# Altium PCB PCB1.pcbdoc
Units mm, origin at the board's own origin, x right, y up, seen from the top; angles counter-clockwise.
Board outline 132.72 x 69.07 mm, 2 copper layers (Top Layer, Bottom Layer); 46 components, 23 nets, 129 pads, 205 vias.
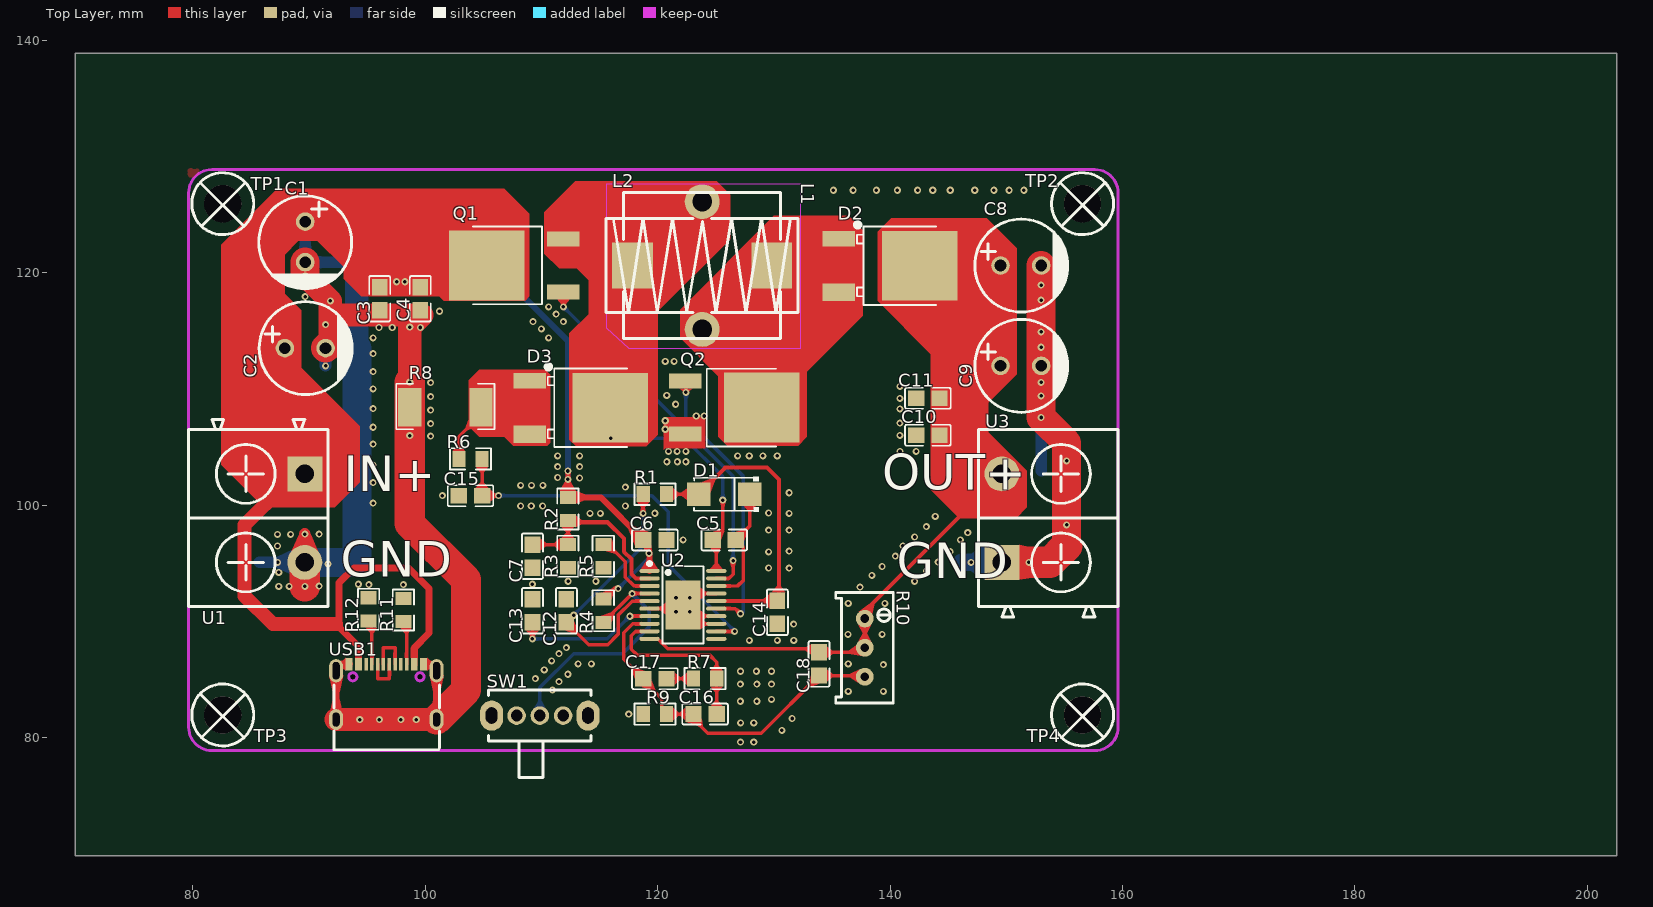
[diagram p0: Top Layer view]
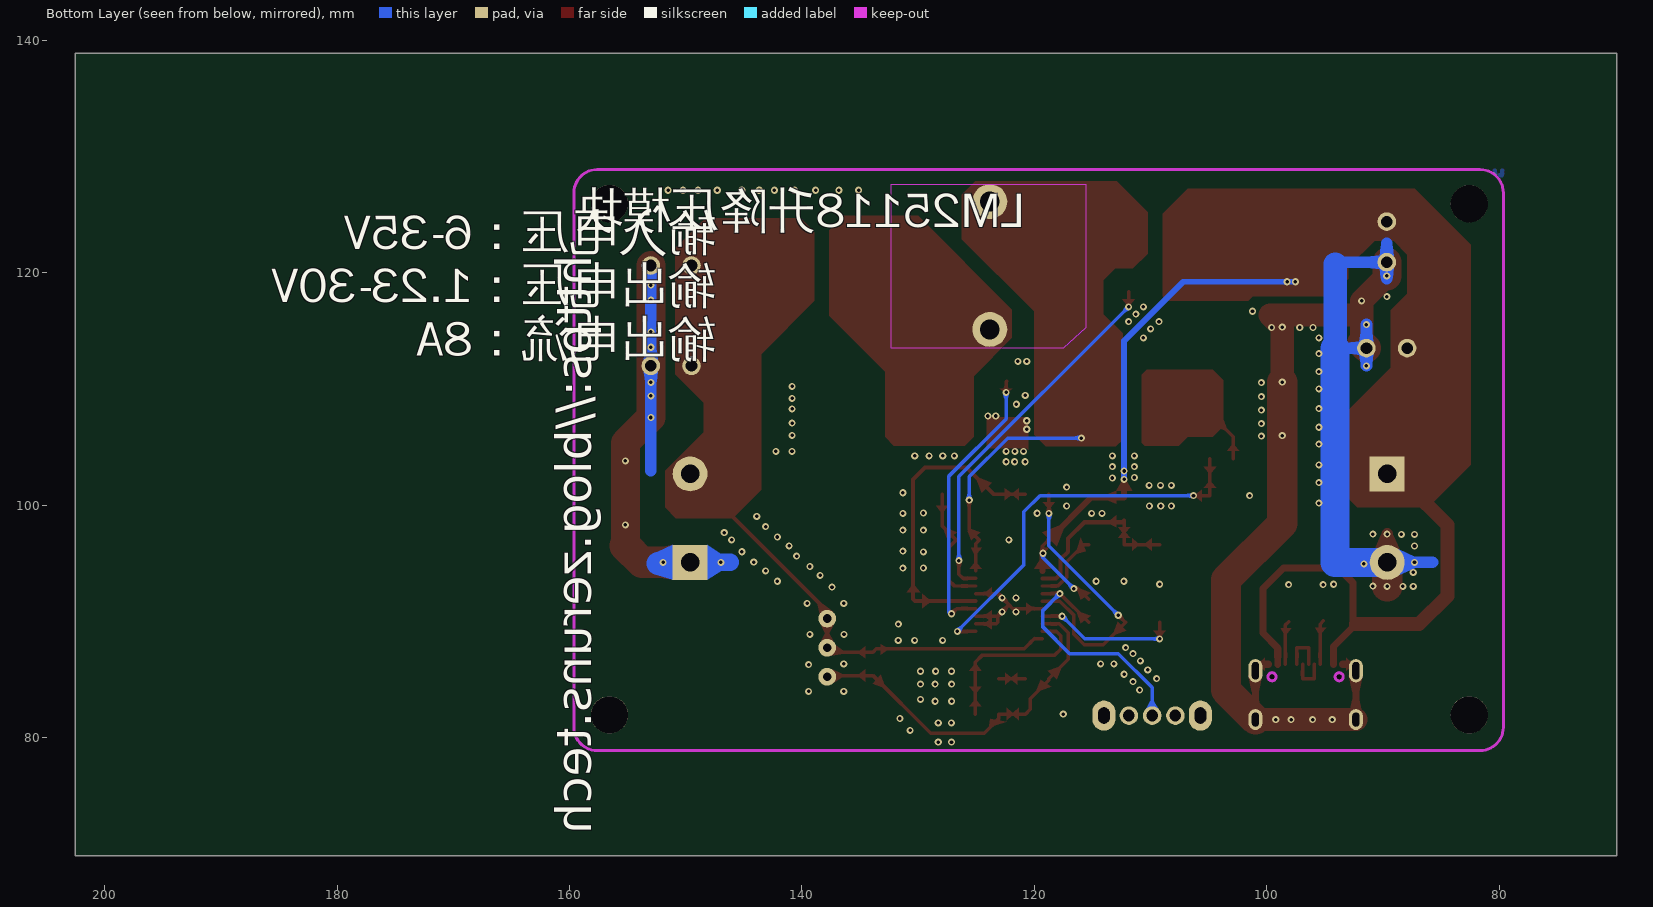
[diagram p1: Bottom Layer view, seen from below]

## Layer stack, top to bottom
Top Layer: signal copper (thickness not stored)
Dielectric: dielectric 0.32, FR-4, Dk 4.8
Bottom Layer: signal copper (thickness not stored)

## Board outline
202.565,69.85 69.85,69.85 69.85,138.919 202.565,138.919

## Design rules (kind name [scope] priority, off if disabled: settings)
BoardOutlineClearance copperThickness1oz [All] p0: genericclearance=0.254 ignorepadtopadclearanceinfootprint=FALSE except(0: Arc-SplitContinuation Track-SplitContinuation SMDPad-SplitContinuation THPad-SplitContinuation Via-SplitContinuation Fill-SplitContinuation Poly-SplitContinuation Region-SplitContinuation Text-SplitContinuation; 0.152: Track-CutoutEdge SMDPad-CutoutEdge THPad-CutoutEdge Via-CutoutEdge Fill-CutoutEdge Region-CutoutEdge; 0.3: Track-OutlineEdge SMDPad-OutlineEdge THPad-OutlineEdge Via-OutlineEdge Fill-OutlineEdge Region-OutlineEdge Poly-OutlineEdge Text-OutlineEdge)
BoardOutlineClearance copperThickness2oz [All] p0: genericclearance=0.254 ignorepadtopadclearanceinfootprint=FALSE except(0: Arc-SplitContinuation Track-SplitContinuation SMDPad-SplitContinuation THPad-SplitContinuation Via-SplitContinuation Fill-SplitContinuation Poly-SplitContinuation Region-SplitContinuation Text-SplitContinuation; 0.152: Track-CutoutEdge SMDPad-CutoutEdge THPad-CutoutEdge Via-CutoutEdge Fill-CutoutEdge Region-CutoutEdge; 0.3: Track-OutlineEdge SMDPad-OutlineEdge THPad-OutlineEdge Via-OutlineEdge Fill-OutlineEdge Region-OutlineEdge Poly-OutlineEdge Text-OutlineEdge)
Clearance copperThickness1oz [(InNet('GND') OR InNet('EN') OR InNet('VIN') OR InNet('RT') OR InNet('RAMP') OR InNet('SS') OR InNet('$1N2811') OR InNet('$1N2592') OR InNet('VOUT') OR InNet('$1N2863') OR InNet('$1N2110') OR InNet('$1N2161') OR InNet('$1N2871') OR InNet('$1N3011') OR InNet('$1N2947') OR InNet('$1N2545') OR InNet('$1N3296') OR InNet('USB_D-') OR InNet('USB_D+') OR InNet('$1N3257') OR InNet('$1N3385') OR InNet('$1N3398') OR InNet('$1N4331'))] p1: gap=0.178 ignorepadtopadclearanceinfootprint=FALSE except(0.102: Track-Track; 0.152: Track-SMDPad SMDPad-SMDPad Track-THPad SMDPad-THPad THPad-THPad Track-Via SMDPad-Via THPad-Via Via-Via Track-Fill SMDPad-Fill THPad-Fill Via-Fill Fill-Fill Track-Region SMDPad-Region THPad-Region Via-Region Fill-Region Region-Region Track-Poly SMDPad-Poly THPad-Poly Via-Poly Fill-Poly Region-Poly Poly-Poly Track-Text SMDPad-Text THPad-Text Via-Text Fill-Text Region-Text Poly-Text Text-Text Track-Hole SMDPad-Hole THPad-Hole Via-Hole Fill-Hole Region-Hole Poly-Hole Text-Hole; 0.3: Track-Sheet SMDPad-Sheet THPad-Sheet Via-Sheet Fill-Sheet Region-Sheet Poly-Sheet Text-Sheet Sheet-Hole)
Clearance copperThickness2oz [All] p1: gap=0.178 ignorepadtopadclearanceinfootprint=FALSE except(0.152: Track-SMDPad SMDPad-SMDPad Track-THPad SMDPad-THPad THPad-THPad Track-Via SMDPad-Via THPad-Via Via-Via Track-Fill SMDPad-Fill THPad-Fill Via-Fill Fill-Fill Track-Region SMDPad-Region THPad-Region Via-Region Fill-Region Region-Region Track-Poly SMDPad-Poly THPad-Poly Via-Poly Fill-Poly Region-Poly Poly-Poly Track-Text SMDPad-Text THPad-Text Via-Text Fill-Text Region-Text Poly-Text Text-Text Track-Hole SMDPad-Hole THPad-Hole Via-Hole Fill-Hole Region-Hole Poly-Hole Text-Hole; 0.203: Track-Track; 0.3: Track-Sheet SMDPad-Sheet THPad-Sheet Via-Sheet Fill-Sheet Region-Sheet Poly-Sheet Text-Sheet Sheet-Hole)
DiffPairsRouting differentialPair [All] p1: maxuncoupledlength=10 minlimit=5.9843 maxlimit=5.9843 mostfreqgap=5.9843 toplayer_minwidth=5 toplayer_prefwidth=10 toplayer_maxwidth=100 bottomlayer_minwidth=5 bottomlayer_prefwidth=10 bottomlayer_maxwidth=100
PasteMaskExpansion pasteMaskExpansion [All] p1: expansion=0
PlaneConnect innerPlane [All] p1: planeconnectstyle=Relief reliefexpansion=0.508 reliefentries=4 reliefconductorwidth=0.254 reliefairgap=0.254
PolygonConnect copperRegion [All] p1: connectstyle=Relief reliefentries=4 reliefconductorwidth=19.685 polygonreliefangle="90 Angle" airgapwidth=10
RoutingVias viaSize [All] p1: viastyle="Through Hole" holewidth=12.0078 minholewidth=11.811 maxholewidth=248.0314 width=24.0158 minwidth=19.685 maxwidth=393.7008
SolderMaskExpansion solderMaskExpansion [All] p1: useseparateexpansions=TRUE expansion=2.0079 expansionbottom=2.0079
Width copperThickness1oz [All] p1: maxlimit=118 minlimit=5 preferedwidth=10
Width copperThickness2oz [All] p1: maxlimit=100 minlimit=8 preferedwidth=10

## Components (designator, comment, footprint, x,y, rotation, side; value= is the part's Value field where it differs from the comment)
C1 "GR227M035F12RR0VL4FP0" CAP-TH_BD8.0-P3.50-D0.6-FD 89.662,122.663 r270 top
C2 "KNH2220UF35V149EC0049" CAP-TH_BD8.0-P3.50-D0.6-FD-2 89.662,113.519 r0 top
C3 "CAP_0805" C0805 96.072,117.775 r90 top
C4 "CAP_0805" C0805 99.572,117.775 r90 top
C5 "CAP_0805" C0805 125.73,97.009 r180 top
C6 "CAP_0805" C0805 119.761,97.009 r0 top
C7 "CAP_0805" C0805 109.22,95.612 r90 top
C8 "GR227M035F12RR0VL4FP0" CAP-TH_BD8.0-P3.50-D0.6-FD 151.257,120.631 r0 top
C9 "KNH2220UF35V149EC0049" CAP-TH_BD8.0-P3.50-D0.6-FD-2 151.257,111.995 r0 top
C10 "CAP_0805" C0805 143.256,106.026 r0 top
C11 "CAP_0805" C0805 143.256,109.201 r0 top
C12 "CAP_0805" C0805 112.141,90.913 r270 top
C13 "CAP_0805" C0805 109.22,90.913 r270 top
C14 "CAP_0805" C0805 130.302,90.786 r90 top
C15 "CAP_0805" C0805 103.886,100.819 r0 top
C16 "CAP_0805" C0805 124.079,82.023 r0 top
C17 "CAP_0805" C0805 119.761,85.071 r0 top
C18 "CAP_0805" C0805 133.888,86.339 r90 top
D1 "SS310_C15874" SMA_L4.3-W2.6-LS5.2-RD 125.73,100.946 r180 top
D2 "SBDD2045CT" TO-252-2_L6.5-W6.1-P4.58-LS10.0-TL 139.065,120.631 r0 top
D3 "SBDD2045CT" TO-252-2_L6.5-W6.1-P4.58-LS10.0-TL 112.445,108.41 r0 top
L1 "SLT050125T100MUB" IND-TH_L16.5-W8.5-P11.00-D1.0 123.825,120.631 r270 top
L2 "XR1265-100M" IND-SMD_L13.5-W12.6 123.825,120.631 r0 top
Q1 "NCE7560K" TO-252-2_L6.6-W6.1-P4.57-LS9.9-TL-CW 108.585,120.631 r180 top
Q2 "NCE7560K" TO-252-2_L6.6-W6.1-P4.57-LS9.9-TL-CW 125.684,108.41 r0 top
R1 "Res_0805" R0805 119.761,100.946 r0 top
R2 "Res_0805" R0805 112.268,99.676 r90 top
R3 "Res_0805" R0805 112.268,95.612 r90 top
R4 "Res_0805" R0805 115.316,90.913 r270 top
R5 "Res_0805" R0805 115.316,95.612 r90 top
R6 "Res_0805" R0805 103.886,103.994 r180 top
R7 "Res_0805" R0805 124.079,85.071 r0 top
R8 "HoJLR2512-3W-10mR-1%" RES-SMD_L6.4-W3.2-R2512 101.727,108.439 r0 top
R9 "Res_0805" R0805 119.761,82.023 r0 top
R10 "3296W-1-103" RES-ADJ-TH_3P-L10.0-W10.0-P2.50-L 137.825,87.736 r270 top
R11 "0805W8F5101T5E" R0805 98.108,90.977 r90 top
R12 "0805W8F5101T5E" R0805 95.123,91.04 r90 top
SW1 "SK12D07VG3" SW-TH_SK12D07VG3 109.855,81.896 r0 top
TP1 "M3螺丝" M3螺丝 82.629,125.886 r0 top
TP2 "M3螺丝" M3螺丝 156.629,125.886 r0 top
TP3 "M3螺丝" M3螺丝 82.629,81.886 r0 top
TP4 "M3螺丝" M3螺丝 156.629,81.886 r0 top
U1 "KF7.62-2P_C5173665" CONN-TH_2P-P7.62_KEFA_KF7.62-2P 89.629,98.886 r270 top
U2 "LM25118MHX/NOPB" HTSSOP-20_L6.5-W4.4-P0.65-LS6.4-BL-EP 122.174,91.421 r270 top
U3 "KF7.62-2P_C5173665" CONN-TH_2P-P7.62_KEFA_KF7.62-2P 149.629,98.886 r90 top
USB1 "TYPE-C 16PIN 2MD(073)" USB-C-SMD_TYPE-C-6PIN-2MD-073 96.647,83.928 r0 top

## Footprints (in the part's own frame and the unit in brackets; to place one, negate y for a bottom-side part, rotate by r counter-clockwise, add the part's x,y. Pads: shape width x height; smd on the part's side, far side on the other; paste and mask are expansions set on the pad)
C0805 [mm]
  rect 1.41x1.35 smd: 1(-1,0) 2(1,0)
  silkscreen extent -1.96,-0.9 1.96,0.9
CAP-TH_BD8.0-P3.50-D0.6-FD [mm]
  round 1.6 hole 1: 1(-1.75,0) 2(1.75,0)
  silkscreen extent -3.96,-4 4.04,4
CAP-TH_BD8.0-P3.50-D0.6-FD-2 [mm]
  round 1.6 hole 1: 1(-1.75,0) 2(1.75,0)
  silkscreen extent -3.96,-4 4.04,4
CONN-TH_2P-P7.62_KEFA_KF7.62-2P [mm]
  rect 3x3 hole 1.6: 1(-3.81,0)
  round 3 hole 1.6: 2(3.81,0)
  silkscreen extent -8.51,-10 7.62,2
HTSSOP-20_L6.5-W4.4-P0.65-LS6.4-BL-EP [mm]
  oval 0.343x1.747 smd: 1(-2.925,-2.873) 2(-2.275,-2.873) 3(-1.625,-2.873) 4(-0.975,-2.873) 5(-0.325,-2.873) 6(0.325,-2.873) 7(0.975,-2.873) 8(1.625,-2.873) 9(2.275,-2.873) 10(2.925,-2.873) 11(2.925,2.873) 12(2.275,2.873) 13(1.625,2.873) 14(0.975,2.873) 15(0.325,2.873) 16(-0.325,2.873) 17(-0.975,2.873) 18(-1.625,2.873) 19(-2.275,2.873) 20(-2.925,2.873)
  rect 4.2x3 smd: 21(0,0)
  silkscreen extent -3.7,-3.02 3.33,1.77
IND-SMD_L13.5-W12.6 [mm]
  rect 3.5x4 smd: 1(-6,0) 2(6,0)
  silkscreen extent -6.75,-6.3 6.75,6.3
IND-TH_L16.5-W8.5-P11.00-D1.0 [mm]
  round 3 hole 1.7: 1(-5.5,0) 2(5.5,0)
  silkscreen extent -4.06,-8.26 4.06,8.26
M3螺丝 [mil]
  round 126 hole 126: 1(-2.5,2.5)
  silkscreen extent -107,-102 102,107
R0805 [mm]
  rect 1.133x1.377 smd: 1(-1,0) 2(1,0)
  silkscreen extent -1.76,-0.92 1.76,0.92
RES-ADJ-TH_3P-L10.0-W10.0-P2.50-L [mil]
  round 60 hole 30: 1(-98.42,0) 2(0,0) 3(98.43,0)
  silkscreen extent -187,-98 187,96
RES-SMD_L6.4-W3.2-R2512 [mm]
  rect 2x3.3 smd: 1(-3.066,0) 2(3.066,0)
  silkscreen extent -4.23,-1.91 4.23,2.01
SMA_L4.3-W2.6-LS5.2-RD [mm]
  rect 2x2 smd: 1(-2.2,0) 2(2.2,0)
  silkscreen extent -2.98,-1.5 2.6,1.5
SW-TH_SK12D07VG3 [mm]
  round 1.6 hole 1: 1(-2,0) 2(0,0) 3(2,0)
  oval 2x2.6 hole 1 slot 1.4 at 90 deg: 4(4.15,0) 5(-4.15,0)
  silkscreen extent -4.4,-5.33 4.4,2.2
TO-252-2_L6.5-W6.1-P4.58-LS10.0-TL [mm]
  rect 2.8x1.35 smd: 1(-3.475,2.29)
  rect 2.8x1.5 smd: 3(-3.475,-2.29)
  rect 6.5x6 smd: 4(3.475,-0.017)
  silkscreen extent -2.06,-3.39 4.9,3.7
TO-252-2_L6.6-W6.1-P4.57-LS9.9-TL-CW [mm]
  rect 2.8x1.3 smd: 1(-3.292,2.273) 3(-3.292,-2.273)
  rect 6.5x6 smd: 2(3.292,0)
  silkscreen extent -1.46,-3.35 4.51,3.34
USB-C-SMD_TYPE-C-6PIN-2MD-073 [mm]
  rect 0.6x1.1 smd: 1(-3.2,2.375) 2(-2.4,2.375) 11(2.4,2.375) 12(3.2,2.375)
  rect 0.3x1.1 smd: 3(-1.75,2.375) 4(-1.25,2.375) 5(-0.75,2.375) 6(-0.25,2.375) 7(0.25,2.375) 8(0.75,2.375) 9(1.25,2.375) 10(1.75,2.375)
  oval 1.2x1.8 hole 0.6 slot 1.2 at 90 deg: 13(-4.325,-2.375) 14(4.325,-2.375)
  oval 1.2x2 hole 0.6 slot 1.5 at 90 deg: 13(-4.325,1.825) 14(4.325,1.825)
  Board Outline Layer circle w0.005: c-2.89,1.305 r0.35
  Board Outline Layer circle w0.005: c2.89,1.305 r0.35
  Board Outline Layer circle w0.254: c-2.89,1.305 r0.35
  Board Outline Layer circle w0.254: c2.89,1.305 r0.35
  Multi-Layer board cut-out: -2.54,1.305 -2.589,1.477 -2.717,1.602 -2.89,1.648 -3.063,1.603 -3.191,1.477 -3.24,1.305 -3.24,1.305 -3.191,1.133 -3.063,1.007 -2.89,0.962 -2.717,1.007 -2.589,1.133 -2.54,1.305
  Multi-Layer board cut-out: 3.24,1.305 3.191,1.477 3.063,1.602 2.89,1.648 2.717,1.603 2.589,1.477 2.54,1.305 2.54,1.305 2.589,1.133 2.717,1.007 2.89,0.962 3.063,1.007 3.191,1.133 3.24,1.305
  silkscreen extent -4.5,-4.97 4.57,0.6

## Via types
v1: diameter 0.61, hole 0.305, Top Layer to Bottom Layer, 205 vias

## Nets (pads, with @x,y where several pads share a name; then routed paths per layer and width w, separated by ;. In a path a pad name is that pad's centre, name@x,y a point inside that pad or via, vN(x,y) a via of type N, cw(c..) or ccw(c..) an arc to the next point about the centre after c; other vN are vias at no path point)
$1N2110: C5.1 D1.1 U2.18 | length 10.7
  Top Layer w0.3: U2.18 126.873,93.046 127.381,93.554 127.381,96.358 C5.1 127.93,98.209 D1.1
$1N2161: C14.2 D1.2 R1.2 U2.16 | length 26.8
  Top Layer w0.3: R1.2 D1.2
  Top Layer w0.35: D1.2 125.816,103.232 129.413,103.232 130.429,102.216 130.429,91.913 C14.2 130.262,91.746 U2.16
$1N2545: C17.2 R7.1 | length 2.3
  Top Layer w0.3: C17.2 R7.1
$1N2592: C16.2 R7.2 U2.9 | length 15.2
  Top Layer w0.3: U2.9 118.121,89.146 117.729,88.754 117.729,87.611 118.237,87.103 124.46,87.103 125.079,86.484 R7.2 C16.2
$1N2811: C16.1 C17.1 C18.1 R9.2 R10.3 U2.8 | length 31.1
  Top Layer w0.3: U2.8 117.856,89.796 117.094,89.034 117.094,86.738 C17.1 118.761,84.928 120.334,83.355 120.334,82.45 R9.2 C16.1 123.079,81.599 124.306,80.372 128.921,80.372 C18.1 137.722,85.339 R10.3
$1N2863: Q1.1 U2.19 | length 31.9
  Top Layer w0.3: Q1.1 111.887,118.348 v1(111.887,117.075) ; U2.19 126.121,93.696 126.492,94.067 v1(126.492,95.231)
  Bottom Layer w0.3: v1(111.887,117.075) 126.492,102.47 v1(126.492,95.231)
$1N2871: Q2.1 U2.15 | length 24.5
  Top Layer w0.3: Q2.1 122.428,110.647 v1(122.428,109.709) ; U2.15 126.69,91.096 v1(127.127,90.659)
  Bottom Layer w0.3: v1(122.428,109.709) 122.428,107.423 127.381,102.47 127.381,90.913 v1(127.127,90.659)
$1N2947: D3.1 D3.3 R6.2 R8.2 | length 5.2
  Top Layer w0.3: R6.2 102.886,105.897 104.793,107.804 R8.2
$1N3011: C15.2 R6.1 U2.12 | length 34
  Top Layer w0.3: R6.1 C15.2 v1(106.299,100.819) ; U2.12 v1(126.619,89.146)
  Bottom Layer w0.3: v1(106.299,100.819) 119.507,100.819 120.904,99.422 120.904,94.85 126.619,89.135 v1(126.619,89.146)
$1N3257: R11.1 USB1.10 | length 3.8
  Top Layer w0.3: R11.1 98.397,89.687 USB1.10
$1N3296: R12.1 USB1.4 | length 3.9
  Top Layer w0.3: R12.1 95.397,89.766 USB1.4
$1N3385: C5.2 D3.4 L1.1 L2.1 Q1.3 U2.20 | length 22.3
  Top Layer w0.3: D3.4 115.951,108.362 v1(115.951,105.772) ; U2.20 125.047,96.692 C5.2 125.603,97.882 v1(125.603,100.438)
  Bottom Layer w0.3: v1(115.951,105.772) 122.301,105.772 125.603,102.47 v1(125.603,100.438)
$1N3398: D2.1 D2.3 L1.2 L2.2 Q2.2
$1N4331: C7.2 R2.1 R3.2 U2.2 | length 15.6
  Top Layer w0.3: C7.2 R3.2 R2.1
  Top Layer w0.35: R2.1 112.411,98.533 115.697,98.533 117.094,97.136 117.094,95.993 117.729,95.358 117.729,94.088 118.121,93.696 U2.2
EN: R4.2 SW1.2 U2.4 | length 22.5
  Top Layer w0.3: R4.2 v1(117.799,92.396) U2.4
  Bottom Layer w0.3: SW1.2 109.855,84.309 112.776,87.23 116.967,87.23 119.253,89.516 119.253,90.942 v1(117.799,92.396)
GND: C1.2 C2.2 C3.1 C4.1 C6.2 C7.1 C8.2 C9.2 C10.1 C11.1 C12.1 C13.1 C14.1 C15.1 Q2.3 R3.1 R5.1 R8.1 R9.1 R11.2 R12.2 SW1.3 U1.2 U2.6 U2.13 U2.14 U2.17 U2.21 U3.1 USB1.1 USB1.12 USB1.13 USB1.14 | length 193.9
  Top Layer w0.3: U2.6 121.849,91.096 U2.21 ; U2.13 123.291,89.796 123.149,89.938 U2.21@123.149,90.446 ; U2.14 U2.21@123.149,90.446 ; U2.17 123.149,92.396 v1(122.774,92.021) U2.21 ; U2.21 v1(122.774,90.821) U2.21@123.149,90.446
  Top Layer w0.6: USB1.13@92.322,81.553 USB1.13@92.322,85.753 ; USB1.14@100.972,81.553 USB1.14@100.972,85.753
  Top Layer w0.65: USB1.13@92.322,85.753 92.872,86.303 USB1.1 ; USB1.12 100.422,86.303 USB1.14@100.972,85.753
  Top Layer w1: U1.2 v1(89.629,97.517)
  Top Layer w2: v1(89.662,119.742) v1(91.821,117.583) 91.821,116.369 ; C2.2@91.821,113.928 91.821,116.369 ; USB1.13@92.322,81.553 v1(94.355,81.553) v1(96.05,81.553) v1(97.901,81.553) v1(99.217,81.553) USB1.14@100.972,81.553 ; v1(98.661,110.589) v1(98.661,115.334) 99.695,116.369 91.821,116.369
  Top Layer w2.5: v1(89.662,119.742) C1.2 ; C2.2 C2.2@91.821,113.928 ; C8.2 v1(153.007,118.95) v1(153.007,117.656) v1(153.007,114.914) v1(153.007,113.598) C9.2 v1(153.007,110.565) v1(153.007,109.406) v1(153.007,107.55) 155.194,105.363 v1(155.194,103.809) v1(155.194,98.301) 155.194,96.501
  Top Layer w2.6: v1(89.629,93.012) U1.2 ; v1(98.661,110.589) R8.1 v1(98.661,105.996) 98.661,98.424 103.505,93.58 103.505,84.086 USB1.14@100.972,81.553
  Top Layer w2.7: U3.1 v1(151.946,95.076) 153.769,95.076 155.194,96.501
  Bottom Layer w1: 85.725,95.076 v1(87.275,95.076) U1.2 ; v1@89.662,119.488 C1.2 ; 89.662,122.536 C1.2 ; v1(91.412,111.995) C2.2 ; v1(91.412,115.551) C2.2 ; 94.107,113.471 94.059,113.519 C2.2 ; 94.107,120.758 93.952,120.913 C1.2 ; 153.007,102.978 v1(153.007,107.55) v1(153.007,109.406) v1(153.007,110.565) C9.2 v1(153.007,113.598) v1(153.007,114.914) v1(153.007,117.656) v1(153.007,118.95) C8.2
  Bottom Layer w1.5: 146.177,95.076 v1(146.977,95.076) U3.1
  Bottom Layer w2: 94.107,113.471 94.107,120.758 ; U3.1 149.728,94.977 152.4,94.977
  Bottom Layer w2.5: U1.2 94.107,95.076 94.107,113.471
  other v1: 127.127,79.61 128.27,79.61 130.683,80.626 127.145,81.261 128.27,81.261 131.572,81.642 117.507,82.023 127.116,83.128 128.543,83.128 129.794,83.293 136.398,83.976 139.422,83.976 110.935,84.096 127.116,84.6 128.543,84.6 129.794,84.6 111.506,84.817 109.474,85.071 112.268,85.452 127.127,85.706 128.499,85.706 129.794,85.706 110.236,85.833 139.422,86.283 113.157,86.341 114.3,86.341 136.398,86.341 110.871,86.595 111.506,87.23 112.141,87.738 127.889,88.373 130.302,88.373 131.709,88.373 136.378,88.881 139.319,88.881 131.699,89.77 121.574,90.821 136.398,91.548 139.555,91.548 121.574,92.021 137.414,92.945 87.387,93.012 88.279,93.012 90.866,93.034 95.142,93.173 98.108,93.173 94.234,93.199 109.22,93.199 112.289,93.453 114.681,93.453 142.113,93.453 138.43,93.961 87.387,94.216 143.129,94.342 129.54,94.596 131.318,94.579 139.319,94.723 91.629,94.952 144.145,95.104 140.462,95.612 129.54,95.984 145.161,95.993 131.318,96.05 87.275,96.491 141.097,96.501 122.19,97.009 146.05,97.009 142.113,97.263 87.275,97.494 88.413,97.494 90.866,97.517 146.685,97.644 129.54,97.857 131.318,97.857 143.129,98.152 143.891,99.041 114.173,99.295 115.062,99.295 131.318,99.295 119.761,99.306 129.54,99.328 108.204,99.93 109.117,99.93 110.098,99.93 117.221,99.93 95.504,100.184 101.473,100.819 131.318,101.073 117.221,101.561 108.204,101.708 109.139,101.708 110.12,101.708 95.504,101.937 113.284,102.342 111.379,102.386 111.379,103.323 113.284,103.323 95.504,103.476 120.791,103.74 121.694,103.74 122.428,103.74 111.379,104.248 113.284,104.248 126.873,104.248 127.882,104.248 129.053,104.248 130.29,104.248 120.93,104.629 121.666,104.629 122.428,104.629 140.856,104.629 142.24,104.629 95.504,105.26 100.457,105.951 140.843,106.009 120.65,106.534 95.504,106.709 100.457,107.022 140.843,107.064 120.65,107.27 123.317,107.677 124.002,107.677 100.457,108.185 95.504,108.315 140.843,108.298 121.539,108.693 140.843,109.201 100.457,109.341 120.777,109.455 95.504,110.01 140.843,110.231 100.457,110.545 95.504,111.504 120.65,112.376 121.407,112.376 95.504,113.042 95.504,114.403 110.617,114.408 109.982,115.17 96.012,115.297 97.155,115.297 99.568,115.297 109.269,115.805 111.887,115.805 111.252,116.44 101.219,116.694 110.617,117.075 89.661,117.947 135.128,127.108 136.82,127.108 138.827,127.108 140.633,127.108 142.373,127.108 143.677,127.108 145.182,127.108 147.29,127.108 148.929,127.108 150.241,127.108 151.511,127.108
RAMP: C12.2 R1.1 U2.5 | length 24.3
  Top Layer w0.3: v1(112.776,90.532) 112.157,89.913 C12.2 114.062,87.992 115.697,87.992 116.586,88.881 116.586,90.532 117.8,91.746 U2.5 ; v1(118.745,99.295) 118.745,100.93 R1.1
  Bottom Layer w0.3: v1(112.776,90.532) 118.745,96.501 v1(118.745,99.295)
RT: R5.2 U2.3 | length 6.2
  Top Layer w0.3: R5.2 115.74,96.612 117.221,95.131 117.221,93.808 117.983,93.046 U2.3
SS: C13.2 U2.7 | length 12.3
  Top Layer w0.3: v1(109.22,88.5) C13.2 ; v1(117.602,90.446) U2.7
  Bottom Layer w0.3: v1(109.22,88.5) 115.656,88.5 v1(117.602,90.446)
USB_D+: USB1.6 USB1.8 | length 3.9
  Top Layer w0.3: USB1.6 96.393,86.307 96.393,87.738 97.397,87.738 USB1.8
USB_D-: USB1.5 USB1.7 | length 3.5
  Top Layer w0.3: USB1.5 95.885,86.291 95.885,85.071 96.897,85.071 USB1.7
VIN: C1.1 C2.1 C3.2 C4.2 C6.1 Q1.2 R2.2 R4.1 U1.1 U2.1 USB1.2 USB1.11 | length 91.6
  Top Layer w0.3: v1(112.268,102.216) v1(112.268,102.943) ; R4.1 116.221,92.818 v1(116.586,92.818) ; C6.1 119.301,96.469 119.301,95.818 v1(119.253,95.866)
  Top Layer w0.5: v1(112.268,102.216) R2.2 115.094,100.676 C6.1 ; U2.1 v1@119.301,95.818
  Top Layer w0.6: USB1.2 94.247,87.852 92.329,89.77 92.583,90.024 92.583,93.326 93.853,94.596 98.552,94.596 100.33,92.818 100.33,89.008 99.047,87.725 USB1.11
  Top Layer w1.2: 87.884,101.708 84.455,98.279 84.455,92.183 86.868,89.77 92.329,89.77
  Bottom Layer w0.3: v1(116.586,92.818) 119.253,95.485 v1(119.253,95.866)
  Bottom Layer w0.5: v1(97.536,119.234) v1(98.244,119.234) 107.188,119.234 112.268,114.154 v1(112.268,102.943) v1(112.268,102.216)
VOUT: C8.1 C9.1 C10.2 C11.2 C18.2 D2.4 R10.1 R10.2 U2.10 U3.2 | length 39
  Top Layer w0.3: U2.10 120.019,88.496 120.876,87.639 133.588,87.639 C18.2 137.428,87.339 R10.2 R10.1
  Top Layer w0.35: R10.1 137.825,90.892 U3.2
pads on no net: SW1.1 SW1.4 SW1.5 TP1.1 TP2.1 TP3.1 TP4.1 U2.11 USB1.3 USB1.9

## Polygon pours and split planes (outlines as drawn)
GND on Top Layer (solid, remove dead copper, pour order 0): 78.994,130.029 160.274,130.029 160.274,77.451 78.994,77.451
GND on Bottom Layer (solid, remove dead copper, pour order 2): 76.2,132.569 162.188,132.569 162.188,76.2 76.2,76.2

## Keep-outs
Board Outline Layer:
  region: 115.57,115.259 117.503,113.519 132.334,113.519 132.334,127.616 115.57,127.616
  lines w0.254: 79.629,80.886 ccw(c81.629,80.886) 81.629,78.886 157.629,78.886 ccw(c157.629,80.886) 159.629,80.886 159.629,126.886 ccw(c157.629,126.886) 157.629,128.886 81.629,128.886 ccw(c81.629,126.886) 79.629,126.886 79.629,80.886

## Other copper
Top Layer:
  region net VIN: 86.106,99.803 92.202,99.803 94.361,101.962 94.361,106.801 89.319,111.843 89.319,116.783 87.884,118.218 87.884,121.557 89.079,122.752 90.716,122.752 92.964,120.504 92.964,119.488 94.488,117.964 101.219,117.964 101.6,117.583 108.585,117.583 108.966,117.964 108.966,125.076 106.807,127.235 87.249,127.235 82.423,122.409 82.423,103.486
  region net $1N3398: 121.92,116.821 129.995,124.896 136.451,124.896 137.668,123.679 137.668,116.313 132.842,111.487 132.842,105.899 132.08,105.137 125.984,105.137 125.222,105.899 125.222,111.106 121.92,114.408
  region net $1N3385: 110.236,125.203 110.236,121.647 111.506,120.377 113.03,120.377 114.046,119.361 114.046,116.44 112.395,114.789 112.395,105.65 112.989,105.057 118.999,105.057 120.015,106.073 120.015,116.689 126.238,122.912 126.238,126.727 125.095,127.87 112.903,127.87
  region net $1N2947: 104.648,111.658 103.759,110.769 103.759,106.788 104.648,105.899 106.807,105.899 107.569,105.137 110.49,105.137 110.744,105.391 110.744,111.234 110.32,111.658
  region net VOUT: 138.938,123.552 140.081,124.695 148.336,124.695 150.914,122.117 150.914,111.271 148.463,108.82 148.463,106.28 151.765,102.978 151.765,99.803 150.848,98.886 145.951,98.886 143.51,101.327 143.51,113.011 138.938,117.583
  region net GND: 120.523,107.55 124.079,107.55 124.079,104.891 124.075,104.887 120.654,104.887 120.523,104.756
  region net VIN: 119.051,95.268 118.599,94.518 120.003,94.518 119.551,95.268
  region net RT: 118.066,92.896 118.599,92.875 118.599,93.218 118.066,93.196
  region net EN: 118.066,92.246 118.599,92.225 118.599,92.568 118.066,92.546
  region net RAMP: 118.066,91.596 118.599,91.574 118.599,91.917 118.066,91.896
  region net GND: 120.536,91.246 120.003,91.267 120.003,90.924 120.536,90.946
  region net SS: 118.066,90.296 118.599,90.274 118.599,90.617 118.066,90.596
  region net $1N2811: 118.066,89.646 118.599,89.624 118.599,89.967 118.066,89.946
  region net $1N2592: 118.121,88.996 118.599,88.974 118.599,89.317 118.121,89.296
  region net VOUT: 120.475,88.252 120.003,88.667 120.003,88.324 120.297,88.006
  region net $1N3385: 124.897,94.968 124.522,94.518 125.572,94.518 125.197,94.968
  region net $1N2863: 126.121,93.846 125.749,93.868 125.749,93.525 126.121,93.546
  region net $1N2110: 126.282,93.196 125.749,93.218 125.749,92.875 126.282,92.896
  region net GND: 123.812,92.246 124.345,92.225 124.345,92.568 123.812,92.546
  region net $1N2871: 126.282,91.246 125.749,91.267 125.749,90.924 126.282,90.946
  region net GND: 123.812,90.296 124.345,90.274 124.345,90.617 123.812,90.596
  region net GND: 123.812,89.946 123.812,89.646 124.345,89.624 124.345,89.967
  region net $1N3011: 126.282,89.296 125.749,89.317 125.749,88.974 126.282,88.996
  region net GND: 120.224,91.246 120.224,90.946 120.674,90.571 120.674,91.621
  region net GND: 124.124,89.946 123.674,90.321 123.674,89.321 124.124,89.646
  region net GND: 124.124,90.296 124.124,90.596 123.674,90.971 123.674,89.921
  region net GND: 124.124,92.246 124.124,92.546 123.674,92.921 123.674,91.871
  region net VIN: 113.707,100.426 113.707,100.926 112.957,101.242 112.957,100.11
  region net VIN: 112.518,101.992 112.018,101.992 111.579,101.242 112.957,101.242
  region net $1N4331: 112.118,97.66 112.418,97.66 112.793,98.11 111.743,98.11
  region net $1N4331: 113.482,98.358 113.482,98.708 112.957,99.146 112.957,98.11
  region net $1N4331: 111.129,96.462 111.579,96.087 111.579,97.137 111.129,96.762
  region net $1N4331: 112.118,97.628 111.743,97.178 112.793,97.178 112.418,97.628
  region net VIN: 117.526,97.891 118.056,96.477 119.323,97.684 117.909,98.214
  region net VIN: 119.151,95.884 119.451,95.884 119.466,96.334 118.776,96.334
  region net EN: 116.323,90.708 115.988,90.798 115.14,90.479 116.005,89.859
  region net VIN: 115.988,92.798 115.14,92.479 116.005,91.859 116.323,92.708
  region net RT: 116.323,95.817 116.323,96.242 116.005,97.178 115.564,96.046
  region net RAMP: 112.952,88.89 113.134,89.132 112.816,89.98 112.104,89.208
  region net SS: 109.07,88.758 109.37,88.758 109.745,89.208 108.695,89.208
  region net $1N2863: 111.737,117.258 112.037,117.258 112.412,117.708 111.362,117.708
  region net $1N2871: 122.278,109.709 122.578,109.709 122.953,110.033 121.903,110.033
  region net $1N2161: 122.08,100.796 122.53,100.421 122.53,101.471 122.08,101.096
  region net $1N2161: 124.654,102.317 123.664,101.946 124.53,101.08 124.901,102.07
  region net $1N2110: 127.78,99.496 128.08,99.496 128.455,99.946 127.405,99.946
  region net $1N2947: 103.672,106.471 104.521,106.789 103.793,107.547 103.475,106.698
  region net GND: 151.946,93.726 151.946,96.426 151.129,96.576 151.129,93.576
  region net VOUT: 148.132,102.79 147.702,101.017 147.95,100.769 149.723,101.199
  region net GND: 90.754,96.068 90.129,97.517 89.129,97.517 88.504,96.068
  region net $1N3385: 124.897,95.884 125.197,95.884 125.435,96.334 124.522,96.334
  region net $1N3385: 125.497,97.988 124.663,97.684 125.435,96.972 125.709,97.776
  region net $1N2110: 127.511,98.002 126.663,97.684 127.435,96.972 127.753,97.82
  region net $1N2161: 129.102,91.921 129.102,91.571 129.627,91.133 129.627,92.358
  region net $1N2161: 130.604,93.016 130.254,93.016 129.817,92.491 130.977,92.491
  region net $1N2161: 121.777,100.796 121.777,101.096 121.327,101.471 121.327,100.421
  region net RAMP: 118.595,99.808 118.895,99.808 119.27,100.258 118.22,100.258
  region net $1N4331: 110.345,96.462 110.345,96.762 109.895,97.137 109.895,96.087
  region net $1N2592: 124.929,83.933 125.229,83.933 125.604,84.383 124.554,84.383
  region net $1N2592: 125.229,86.21 124.929,86.21 124.554,85.76 125.604,85.76
  region net $1N2545: 122.063,84.921 122.513,84.546 122.513,85.596 122.063,85.221
  region net $1N2545: 121.916,84.921 121.916,85.221 121.466,85.596 121.466,84.546
  region net $1N2811: 119.784,84.117 119.466,84.965 118.551,84.396 119.399,84.078
  region net $1N2811: 117.98,86.064 117.738,85.882 118.056,85.034 118.828,85.746
  region net $1N2592: 124.929,83.148 124.554,82.698 125.604,82.698 125.229,83.148
  region net $1N2811: 123.436,81.03 123.86,81.03 123.784,81.636 122.374,81.348
  region net $1N2811: 121.924,82.173 121.924,81.873 122.374,81.498 122.374,82.548
  region net $1N2811: 121.777,82.173 121.327,82.548 121.327,81.498 121.777,81.873
  region net VOUT: 137.097,87.962 136.458,87.489 136.641,87.189 137.692,86.986
  region net VOUT: 138.397,88.24 137.975,89.032 137.675,89.032 137.254,88.24
  region net VOUT: 137.254,89.732 137.675,88.941 137.975,88.941 138.397,89.732
  region net VOUT: 138.458,90.661 138.619,91.438 138.181,91.496 137.324,90.811
  region net $1N2811: 137.403,85.871 136.552,85.489 136.511,85.189 137.248,84.738
  region net VOUT: 132.763,87.789 132.763,87.489 133.213,87.114 133.213,88.044
  region net VOUT: 135.013,87.489 134.563,87.864 134.563,86.814 135.013,87.189
  region net $1N2811: 133.077,84.316 133.926,84.634 133.213,85.407 132.895,84.558
  region net $1N2811: 135.013,85.489 134.563,85.864 134.563,84.814 135.013,85.189
  region net $1N3011: 106.041,100.669 106.041,100.969 105.591,101.344 105.591,100.294
  region net $1N3011: 104.736,101.944 104.361,101.494 105.411,101.494 105.036,101.944
  region net $1N2947: 103.036,105.133 102.736,105.133 102.361,104.683 103.411,104.683
  region net $1N3011: 104.736,102.856 105.036,102.856 105.411,103.306 104.361,103.306
  region net GND: 92.872,85.978 93.147,85.753 93.147,86.853 92.872,86.628
  region net VIN: 93.947,87.753 93.947,86.853 94.547,86.853 94.547,87.753
  region net $1N3296: 95.247,87.303 95.247,86.853 95.547,86.853 95.547,87.303
  region net USB_D-: 97.047,85.303 97.047,85.753 96.747,85.753 96.747,85.303
  region net USB_D+: 97.247,87.303 97.247,86.853 97.547,86.853 97.547,87.303
  region net $1N3257: 98.247,87.303 98.247,86.853 98.547,86.853 98.547,87.303
  region net VIN: 98.747,87.725 98.747,86.853 99.347,86.853 99.347,87.725
  region net GND: 100.422,86.628 100.147,86.853 100.147,85.753 100.422,85.978
  region net GND: 92.622,83.934 92.922,85.353 91.722,85.353 92.022,83.934
  region net GND: 101.272,83.934 101.572,85.353 100.372,85.353 100.672,83.934
  region net GND: 92.622,83.273 92.022,83.273 91.722,81.853 92.922,81.853
  region net GND: 101.272,83.273 100.672,83.273 100.372,81.853 101.572,81.853
  region net $1N3257: 98.247,88.96 98.547,88.96 98.796,89.41 97.872,89.41
  region net $1N3296: 95.247,89.024 95.547,89.024 95.812,89.474 94.872,89.474
  region net $1N2863: 126.263,95.029 126.342,94.713 126.642,94.713 126.721,95.029
  region net $1N2863: 112.116,117.277 112.037,117.594 111.737,117.594 111.658,117.277
  region net $1N3385: 125.374,100.236 125.453,99.92 125.753,99.92 125.832,100.236
  region net $1N3385: 116.18,105.974 116.101,106.291 115.801,106.291 115.722,105.974
  region net $1N2871: 127.146,90.963 126.866,91.132 126.654,90.92 126.823,90.64
  region net $1N2871: 122.657,109.911 122.578,110.228 122.278,110.228 122.199,109.911
  region net SS: 117.804,90.217 118.121,90.296 118.121,90.596 117.804,90.675
  region net SS: 109.449,88.702 109.37,89.019 109.07,89.019 108.991,88.702
  region net EN: 118.001,92.167 118.318,92.246 118.318,92.546 118.001,92.625
  region net VIN: 116.384,93.047 116.221,92.968 116.221,92.668 116.384,92.589
  region net VIN: 119.511,96.029 119.451,96.36 119.151,96.407 119.059,96.101
  region net RAMP: 118.974,99.497 118.895,99.814 118.595,99.814 118.516,99.497
  region net RAMP: 112.472,90.551 112.303,90.271 112.515,90.059 112.795,90.228
  region net $1N3011: 126.417,89.375 126.1,89.296 126.1,88.996 126.417,88.917
  region net $1N3011: 106.097,101.048 105.78,100.969 105.78,100.669 106.097,100.59
  region net VIN: 112.497,102.418 112.418,102.735 112.118,102.735 112.039,102.418
  region net VIN: 112.039,102.741 112.118,102.424 112.418,102.424 112.497,102.741
  region net GND: 122.755,90.517 123.034,90.349 123.246,90.561 123.078,90.84
  region net GND: 122.793,91.125 122.514,91.294 122.301,91.081 122.47,90.802
  region net GND: 122.47,92.04 122.301,91.761 122.514,91.549 122.793,91.717
  region net GND: 123.078,92.002 123.246,92.281 123.034,92.493 122.755,92.325
  region net GND: 121.867,90.904 121.455,91.102 119.301,91.246 119.301,90.946
Bottom Layer:
  region net GND: 153.607,112.524 153.507,113.355 152.507,113.355 152.407,112.524
  region net GND: 152.407,111.466 152.507,110.635 153.507,110.635 153.607,111.466
  region net GND: 152.407,120.102 152.507,119.271 153.507,119.271 153.607,120.102
  region net GND: 90.812,112.99 90.912,112.159 91.912,112.159 92.012,112.99
  region net GND: 92.012,114.048 91.912,114.879 90.912,114.879 90.812,114.048
  region net GND: 91.941,112.919 92.772,113.019 92.772,114.019 91.941,114.119
  region net GND: 90.262,121.442 90.162,122.273 89.162,122.273 89.062,121.442
  region net GND: 89.062,120.384 89.162,119.553 90.162,119.553 90.262,120.384
  region net GND: 90.191,120.313 91.022,120.413 91.022,121.413 90.191,121.513
  region net GND: 146.977,94.326 148.129,93.576 148.129,96.576 146.977,95.826
  region net GND: 152.4,95.977 151.129,96.576 151.129,93.576 152.4,93.977
  region net GND: 88.637,96.201 87.275,95.576 87.275,94.576 88.637,93.951
  region net EN: 109.705,83.132 109.33,82.5 110.38,82.5 110.005,83.132
  region net $1N2863: 126.721,95.433 126.642,95.75 126.342,95.75 126.263,95.433
  region net $1N2863: 111.868,116.771 112.148,116.602 112.36,116.814 112.191,117.094
  region net $1N3385: 125.832,100.64 125.753,100.957 125.453,100.957 125.374,100.64
  region net $1N3385: 116.153,105.543 116.47,105.622 116.47,105.922 116.153,106.001
  region net $1N2871: 127.431,90.64 127.487,90.807 127.275,91.019 127.108,90.963
  region net $1N2871: 122.199,109.507 122.278,109.191 122.578,109.191 122.657,109.507
  region net SS: 117.298,90.465 117.129,90.185 117.341,89.973 117.621,90.142
  region net SS: 109.422,88.271 109.739,88.35 109.739,88.65 109.422,88.729
  region net EN: 117.78,92.092 118.06,91.923 118.272,92.136 118.104,92.415
  region net VIN: 116.89,92.799 117.059,93.079 116.847,93.291 116.567,93.122
  region net VIN: 119.024,95.664 119.103,95.485 119.403,95.485 119.482,95.664
  region net RAMP: 118.516,99.093 118.595,98.777 118.895,98.777 118.974,99.093
  region net RAMP: 113.08,90.513 113.249,90.793 113.037,91.005 112.757,90.836
  region net $1N3011: 126.63,89.451 126.35,89.616 126.144,89.398 126.315,89.119
  region net $1N3011: 106.501,100.59 106.818,100.669 106.818,100.969 106.501,101.048

## Silkscreen, mask and mechanical layers (free items; w line width, h text height)
Top Silkscreen Layer:
  text "OUT+" at 139.319,101.327 h3.05
  text "IN+" at 92.964,101.2 h3.05
  text "GND" at 92.71,93.834 h3.05
  text "GND" at 140.589,93.707 h3.05
Bottom Silkscreen Layer:
  text "LM25118升降压模块" at 120.777,123.933 h3.05
  text "https://blog.zeruns.tech" at 158.115,121.52 h3.05 r270
  text "输入电压：6-35V /  输出电压：1.23-30V /  输出电流：8A" at 147.447,112.884 h3.05